# Altium PCB icaplamp_evo.PcbDoc
Units mil, origin at the board's own origin, x right, y up, seen from the top; angles counter-clockwise.
Board outline 2362.2 x 1574.8 mil, 2 copper layers (Top Layer, Bottom Layer); 26 components, 48 nets, 156 pads, 25 vias.
Unrouted connection lines stored in the file: 2.
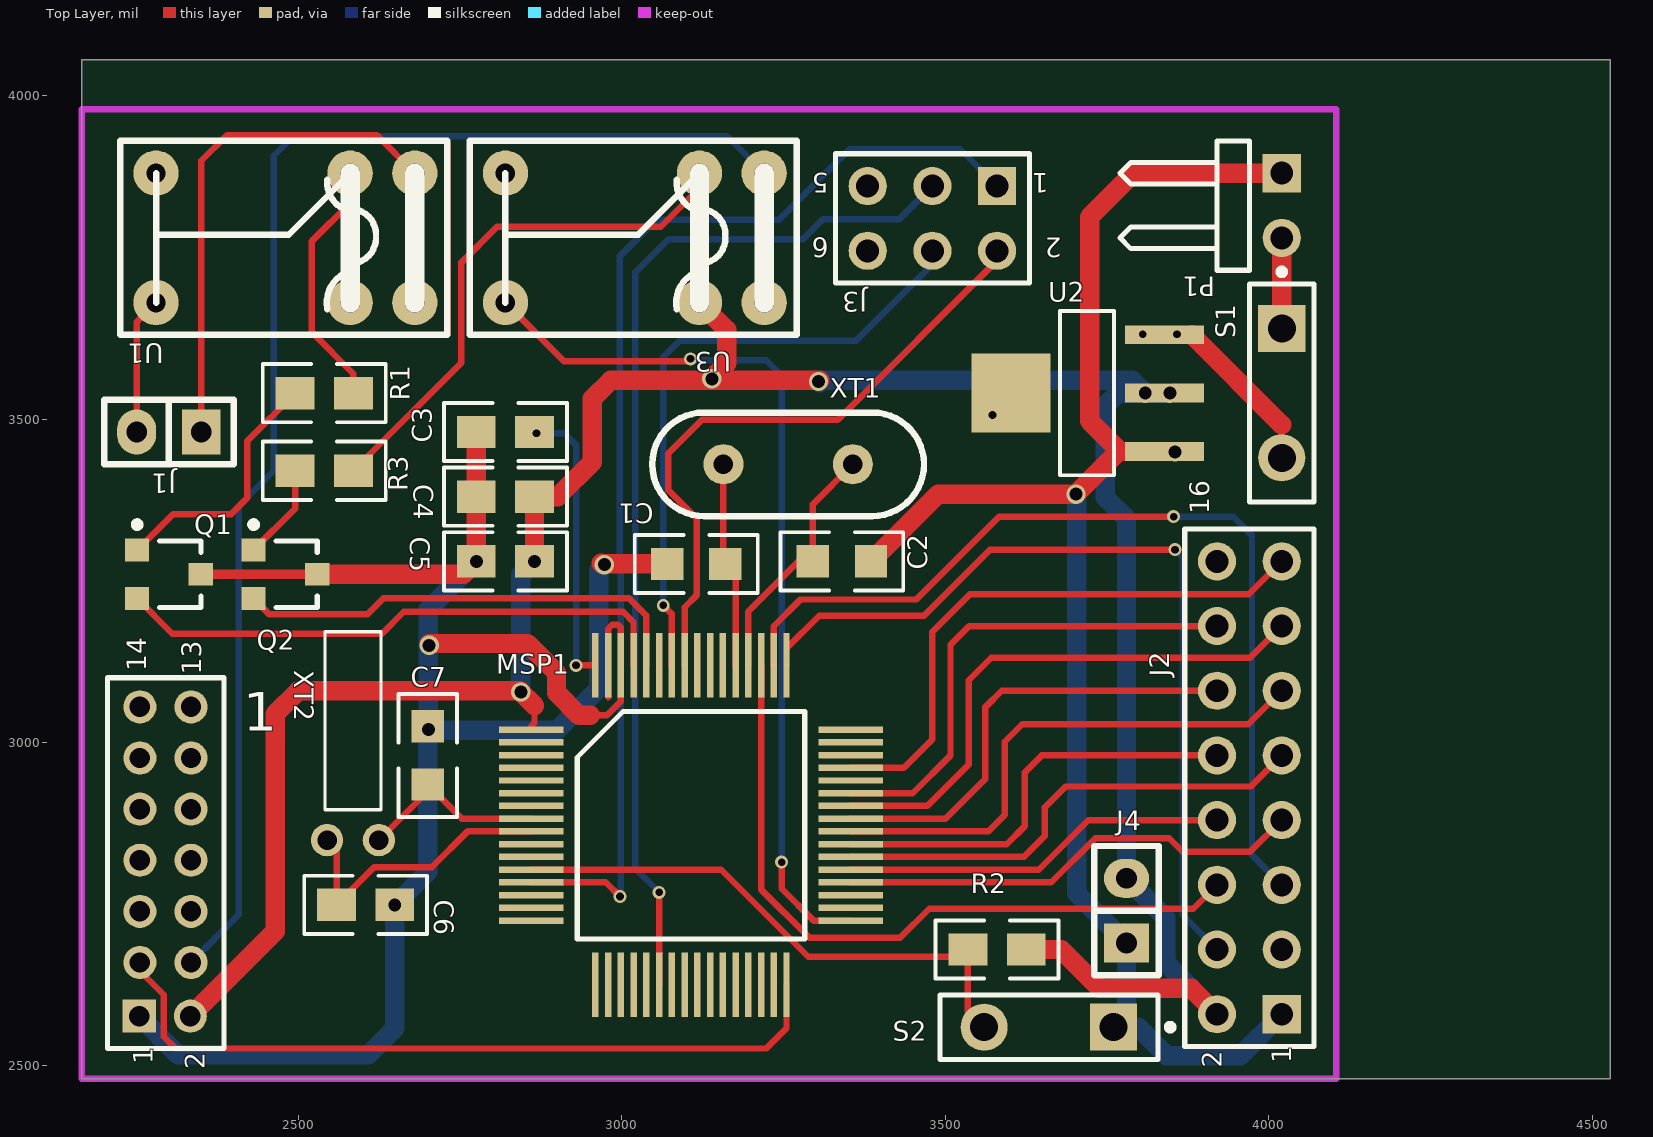
[diagram p0: Top Layer view]
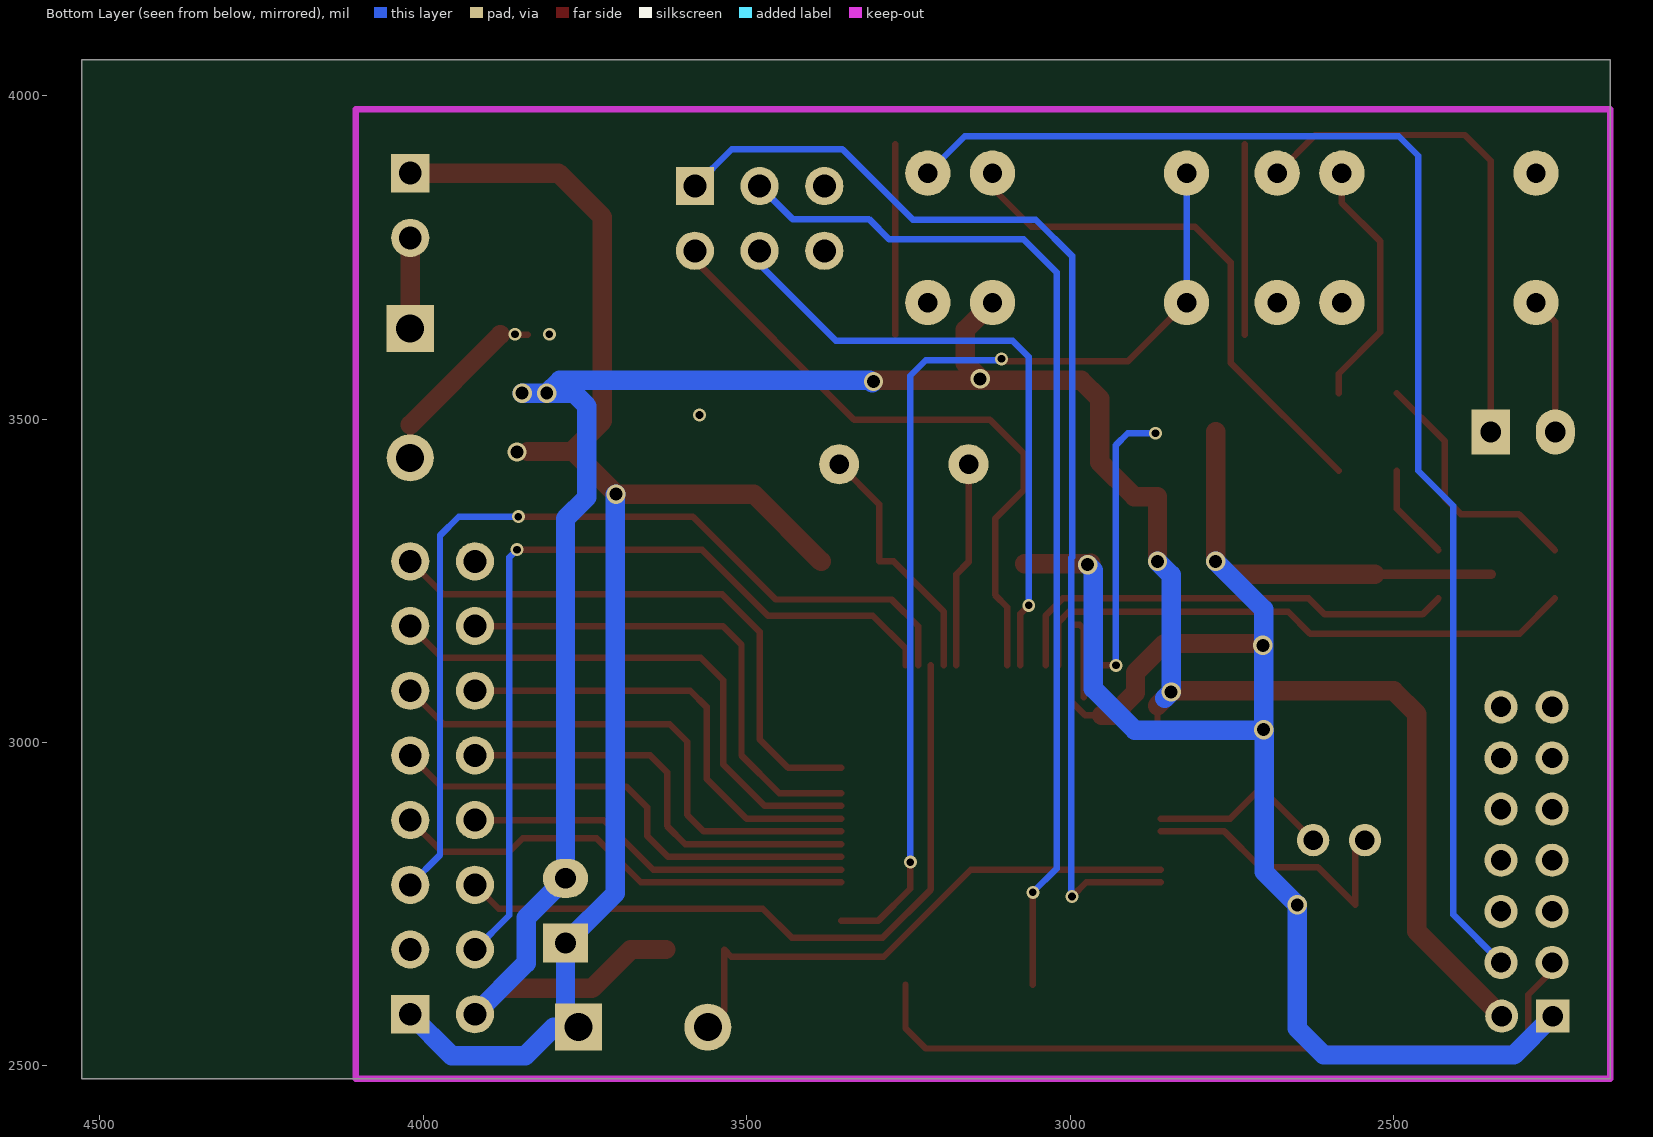
[diagram p1: Bottom Layer view, seen from below]

## Layer stack, top to bottom
Top Layer: signal copper 1.4
Dielectric: dielectric 12.6, FR-4, Dk 4.8
Bottom Layer: signal copper 1.4

## Board outline
2165.35,4055.12 2165.35,2480.32 4527.56,2480.32 4527.56,4055.12

## Design rules (kind name [scope] priority, off if disabled: settings)
Clearance [All] p1: gap=5
ComponentClearance [All] p1: gap=10 collisioncheckmode=3 verticalgap=10
PlaneClearance [All] p1: clearance=5
PolygonConnect [All] p1: connectstyle=Relief reliefconductorwidth=10 reliefentries=4 polygonreliefangle="90 Angle"
RoutingVias [All] p1: holewidth=15 width=25 viastyle="Through Hole" minholewidth=10 minwidth=15 maxholewidth=100 maxwidth=100
SolderMaskExpansion [All] p1: expansion=5
TestPointUsage [All] p1: valid=0 allowmultiple=FALSE
Testpoint [All] p1: side=15 testpointundercomponent=TRUE minsize=40 maxsize=100 preferedsize=60 minholesize=0 maxholesize=40 preferedholesize=32 testpointgrid=1 style=1023 order=0123456789
Width [All] p1: maxlimit=100 minlimit=1 preferedwidth=15
16 further rules are at their usual default settings.

## Components (designator, comment, footprint, x,y, rotation, side; value= is the part's Value field where it differs from the comment)
1 "WIFI_CON" wificon 1960,2640 r0 top
C1 "22pF" 0805#1 3115,3276 r0 top
C2 "22pF" 0805#1 3340,3280 r180 top
C3 "104" 0805#2 2820,3480 r180 top
C4 "104" 0805#2 2820,3380 r0 top
C5 "104" 0805#2 2820,3280 r0 top
C6 "Cap" 0805#2 2604,2749 r0 top
C7 "Cap" 0805#1 2700,2980 r90 top
J1 "LIGHT_CONTROL_CON" SIP2 2300,3480 r180 top
J2 "LCD_CON" HDR2X8 4020,2580 r90 top
J3 "BSL" HDR2X3 3580,3860 r180 top
J4 "LCD_VCC_CON" SIP2 3780,2740 r90 top
MSP1 "MSP430F149IPAG" PAG 2860,3020 r0 top
P1 "Power_In" HDR1X2H 4020,3880 r270 top
Q1 "QNPN" SO-G3/C2.5 2300,3260 r270 top
Q2 "QNPN" SO-G3/C2.5 2480,3260 r270 top
R1 "Res2" 0805#2 2540,3540 r0 top
R2 "Res2" 0805#2 3580,2680 r180 top
R3 "Res2" 0805#2 2540,3420 r0 top
S1 "SW-PB" SPST-2 4020,3540 r270 top
S2 "SW-PB" SPST-2 3660,2560 r180 top
U1 "RELAY3.3V" Relay5V 2420,3660 r90 top
U2 "AMS1117" SOT-223 3720,3540 r90 top
U3 "RELAY3.3V" Relay5V 2960,3660 r90 top
XT1 "8MHZ" HC-49S 3517,3310 r180 top
XT2 "32768HZ" AT26 2484,2789 r90 top

## Footprints (in the part's own frame and the unit in brackets; to place one, negate y for a bottom-side part, rotate by r counter-clockwise, add the part's x,y. Pads: shape width x height; smd on the part's side, far side on the other; paste and mask are expansions set on the pad)
0805#1 [mil]
  rect 50x50 smd: 1(-45,0) 2(45,0)
  silkscreen extent -95,-45 95,45
0805#2 [mil]
  rect 60x50 smd: 1(-45,0) 2(45,0)
  silkscreen extent -95,-45 95,45
AT26 [mil]
  round 50 hole 30: 1(60,-140.35) 2(60,-60.35)
  silkscreen extent 105,-144 382,-57
HC-49S [mil]
  round 62 hole 30: 1(160,-120) 2(360,-120)
  silkscreen extent 50,-200 470,-40
HDR1X2H [mm] "Connector; Header; 2 Position; Right Angle"
  rect 1.5x1.5 hole 0.9: 1(0,0)
  round 1.5 hole 0.9: 2(2.54,0)
  silkscreen extent -1.27,-6.35 3.81,-1.27
HDR2X3 [mm] "Connector; Header; 3x2 Position"
  rect 1.5x1.5 hole 0.9: 1(0,0)
  round 1.5 hole 0.9: 2(0,2.54) 3(2.54,0) 4(2.54,2.54) 5(5.08,0) 6(5.08,2.54)
  silkscreen extent -1.27,-1.27 6.35,3.81
HDR2X8 [mm] "Connector; Header; 8x2 Position"
  rect 1.5x1.5 hole 0.9: 1(0,0)
  round 1.5 hole 0.9: 2(0,2.54) 3(2.54,0) 4(2.54,2.54) 5(5.08,0) 6(5.08,2.54) 7(7.62,0) 8(7.62,2.54) 9(10.16,0) 10(10.16,2.54) 11(12.7,0) 12(12.7,2.54) 13(15.24,0) 14(15.24,2.54) 15(17.78,0) 16(17.78,2.54)
  silkscreen extent -1.27,-1.27 19.05,3.81
PAG [mil]
  rect 100x10 smd: 1(0,0) 2(0,-19.68) 3(0,-39.37) 4(0,-59.05) 5(0,-78.74) 6(0,-98.43) 7(0,-118.11) 8(0,-137.8) 9(0,-157.48) 10(0,-177.16) 11(0,-196.85) 12(0,-216.53) 13(0,-236.22) 14(0,-255.91) 15(0,-275.59) 16(0,-295.28) 33(493.7,-295.28) 34(493.7,-275.59) 35(493.7,-255.91) 36(493.7,-236.22) 37(493.7,-216.53) 38(493.7,-196.85) 39(493.7,-177.16) 40(493.7,-157.48) 41(493.7,-137.8) 42(493.7,-118.11) 43(493.7,-98.43) 44(493.7,-78.74) 45(493.7,-59.05) 46(493.7,-39.37) 47(493.7,-19.68) 48(493.7,0)
  rect 10x100 smd: 17(99.21,-394.49) 18(118.9,-394.49) 19(138.58,-394.49) 20(158.27,-394.49) 21(177.95,-394.49) 22(197.64,-394.49) 23(217.32,-394.49) 24(237.01,-394.49) 25(256.69,-394.49) 26(276.38,-394.49) 27(296.06,-394.49) 28(315.75,-394.49) 29(335.43,-394.49) 30(355.12,-394.49) 31(374.8,-394.49) 32(394.49,-394.49) 49(394.49,99.21) 50(374.8,99.21) 51(355.12,99.21) 52(335.43,99.21) 53(315.75,99.21) 54(296.06,99.21) 55(276.38,99.21) 56(256.69,99.21) 57(237.01,99.21) 58(217.32,99.21) 59(197.64,99.21) 60(177.95,99.21) 61(158.27,99.21) 62(138.58,99.21) 63(118.9,99.21) 64(99.21,99.21)
  silkscreen extent 71,-323 423,28
Relay5V [mil]
  round 70 hole 30: 1(20,140) 1(220,140) 2(20,-260) 3(220,-260) 4(20,-160) 5(220,-160)
  Top Layer lines w10: -30,-310 265,-310
  silkscreen extent -30,-310 270,195
SIP2 [mil]
  rect 60x70 hole 32: 1(-50,0)
  oval 60x70 hole 32: 2(50,0)
  silkscreen extent -100,-50 100,50
SO-G3/C2.5 [mm] "SOT-23; 3 Leads; Body 3.0 x 2.6 mm, inc. leads (LxW max)"
  rect 0.9x0.95 smd: 1(-0.95,-1.25) 2(0.95,-1.25) 3(0,1.25)
  silkscreen extent -2.07,-1.37 1.3,1.25
SOT-223 [mm]
  rect 3.1x3.1 smd: 0(0,3.01)
  rect 0.74x3.1 smd: 1(-2.29,-3.01) 2(0,-3.01) 3(2.29,-3.01)
  silkscreen extent -3.23,-1.03 3.23,1.08
SPST-2 [mm] "Circuit Breaker; 2 Leads"
  rect 1.85x1.85 hole 1.1: 1(-2.54,0)
  round 1.85 hole 1.1: 2(2.54,0)
  silkscreen extent -4.89,-1.27 4.28,1.27
wificon [mm]
  rect 1.3x1.3 hole 0.8: 1(7.468,-1.6)
  round 1.3 hole 0.8: 2(9.474,-1.6) 3(7.493,0.508) 4(9.5,0.508) 5(7.493,2.515) 6(9.5,2.515) 7(7.493,4.521) 8(9.5,4.521) 9(7.493,6.528) 10(9.5,6.528) 11(7.493,8.534) 12(9.5,8.534) 13(7.493,10.541) 14(9.5,10.541)
  silkscreen extent 6.22,-2.87 10.79,11.68

## Part data
1: library part CON14
C1 C2 C3 C4 C5: library part Cap, "Capacitor"
C6 C7: "Capacitor"
J1 J4: library part CON2
J2: library part CON16
J3: library part CON6
P1: library part "Header 2H", "Header, 2-Pin, Right Angle"
Q1 Q2: "NPN Bipolar Transistor"
R1 R2 R3: "Resistor"
S1 S2: "Switch"
U1 U3: library part RELAY5V
U2: "LDO ADJ"
XT1: "CY-49S-8MHZ"
XT2: "CY-AT26-32768HZ"

## Via types
v1: diameter 30, hole 20, Top Layer to Bottom Layer, 13 vias
v2: diameter 20, hole 12, Top Layer to Bottom Layer, 12 vias

## Nets (pads, with @x,y where several pads share a name; then routed paths per layer and width w, separated by ;. In a path a pad name is that pad's centre, name@x,y a point inside that pad or via, vN(x,y) a via of type N, cw(c..) or ccw(c..) an arc to the next point about the centre after c; other vN are vias at no path point)
BSL_RXD: J3.3 MSP1.22 | length 1630.8
  Top Layer w10: MSP1.22 v2(3057.64,2768.36)
  Bottom Layer w10: v2(3057.64,2768.36) 3021,2805 3021,3727 3072,3778 3280,3778 3311,3809 3429,3809 J3.3
BSL_TXD: J3.1 MSP1.13 | length 1811.8
  Top Layer w10: MSP1.13 2975.22,2783.78 v2(2997,2762)
  Bottom Layer w10: v2(2997,2762) 2998,2763 2998,3285.36 2997,3286.36 2997,3752 3053,3808 3243,3808 3352,3917 3523,3917 J3.1
DGND: J3.5
EC: J2.6 MSP1.51 | length 1116.2
  Top Layer w10: MSP1.51 3215.12,2772.88 3290,2698 3430,2698 3475,2743 3883,2743 J2.6
GND: 1.1 C1.1 C2.1 C3.2 C4.1 C5.1 C6.2 C7.2 J2.1 J4.1 MSP1.62 MSP1.63 P1.1 Q1.3 Q2.3 S2.1 U2.1 | length 5541.6
  Top Layer w10: 2934,3042 2977,3042 2998.58,3063.58 MSP1.62 2998.58,3177.42 2994,3182 2985,3182 2978.9,3175.9 MSP1.63 ; MSP1.63@2978.9,3069.75 MSP1.63 ; MSP1.63@2978.9,3136.1 MSP1.63
  Top Layer w15: Q1.3 Q2.3
  Top Layer w30: Q2.3 2755,3260 v1(2775,3280) C4.1 ; v1@2702,3153 2854,3153 2899,3108 2899,3077 2934,3042 2951.14,3042 ; 2775,3440 C4.1 ; C3.2 C4.1 ; v1@2968,3277 2969,3276 C1.1 ; C2.1 3489,3384 v1(3702,3384) 3767.84,3449.84 3770.16,3449.84 ; U2.1 3770.16,3449.84 ; P1.1 3791,3880 3723,3812 3723,3497 3770.16,3449.84
  Bottom Layer w30: 1.1 2314,2517 2608,2517 2649,2558 v1(2649,2749) 2700,2800 v1@2700,3019 ; v1(2775,3280) 2701,3206 v1(2701,3020) v1@2700,3019 ; v1(2973,3275) 2964,3266 2964,3083 2900,3019 v1@2700,3019 ; v1(3702,3384) 3703,3383 3703,2767 J4.1 3780,2580 S2.1 3798,2560 3842,2516 3956,2516 J2.1
  other v1: 2702,3150 3855,3449
NetC1_2: C1.2 MSP1.53 XT1.2 | length 318.6
  Top Layer w10: XT1.2 3157,3279 3175.75,3260.25 MSP1.53
NetC2_2: C2.2 MSP1.52 XT1.1 | length 390.6
  Top Layer w10: MSP1.52 3195.43,3202.43 3273,3280 C2.2 3295,3368 XT1.1
NetC3_1: C3.1 MSP1.64 | length 439.6
  Top Layer w10: v2@2929,3119 v2(2929.21,3119.21) MSP1.64
  Bottom Layer w10: v2(2868,3478) 2911,3478 2929.21,3459.79 v2(2929.21,3119.21)
NetC6_1: C6.1 MSP1.9 XT2.2 | length 454.1
  Top Layer w10: XT2.2 2559,2834.35 C6.1 2617,2807 2706,2807 2761.52,2862.52 MSP1.9
NetC7_1: C7.1 MSP1.8 XT2.1 | length 299.2
  Top Layer w10: XT2.1 2700,2924.64 C7.1 2752.79,2882.2 MSP1.8
NetJ1_1: J1.1 U1.3 | length 790
  Top Layer w10: J1.1 2350,3899 2390,3939 2621,3939 U1.3
NetJ1_2: J1.2 U1.1 | length 212.4
  Top Layer w10: J1.2 2250,3650 U1.1@2280,3680
NetJ2_7: J2.7 MSP1.36 | length 723.6
  Top Layer w10: MSP1.36 3663.78,2783.78 3732,2852 3846,2852 3867,2831 3971,2831 J2.7
NetJ2_8: J2.8 MSP1.37 | length 598
  Top Layer w10: MSP1.37 3644.47,2803.47 3721,2880 J2.8
NetJ2_9: J2.9 MSP1.38 | length 757
  Top Layer w10: MSP1.38 3621.15,2823.15 3654,2856 3654,2900 3686,2932 3972,2932 J2.9
NetJ2_10: J2.10 MSP1.39 | length 671.7
  Top Layer w10: MSP1.39 3594.84,2842.84 3623,2871 3623,2954 3649,2980 J2.10
NetJ2_11: J2.11 MSP1.40 | length 822.6
  Top Layer w10: MSP1.40 3566.52,2862.52 3592,2888 3592,3001 3619,3028 3968,3028 J2.11
NetJ2_12: J2.12 MSP1.41 | length 713.3
  Top Layer w10: MSP1.41 3500.2,2882.2 3562,2944 3562,3055 3587,3080 J2.12
NetJ2_13: J2.13 MSP1.42 | length 857.6
  Top Layer w10: MSP1.42 3471.89,2901.89 3536,2966 3536,3096 3571,3131 3971,3131 J2.13
NetJ2_14: J2.14 MSP1.43 | length 773.5
  Top Layer w10: MSP1.43 3449.57,2921.57 3508,2980 3508,3151 3537,3180 J2.14
NetJ2_15: J2.15 MSP1.45 | length 895.7
  Top Layer w10: MSP1.45 3435.95,2960.95 3480,3005 3480,3171 3538,3229 3969,3229 J2.15
NetMSP1_12: MSP1.12 R2.2 S2.2 | length 865.6
  Top Layer w10: MSP1.12 3153.53,2803.47 3288,2669 3524,2669 R2.2 3535,2585 S2.2
NetMSP1_33: MSP1.33 U3.1 | length 1596.6
  Top Layer w10: U3.1@2820,3680 2911,3589 v2@3107,3589 ; v2(3247,2815) 3247,2774 3296.28,2724.72 MSP1.33
  Bottom Layer w10: U3.1@2820,3680 U3.1@2820,3880 ; v2(3106,3593) 3108,3591 3223,3591 3247,3567 v2(3247,2815)
NetQ1_1: Q1.1 R1.1 | length 396.2
  Top Layer w10: Q1.1 2306.39,3353 2396,3353 2421,3378 2421,3466 R1.1
NetQ2_1: Q2.1 R3.1 | length 149.2
  Top Layer w10: Q2.1 2495,3361.61 R3.1
NetR1_2: R1.2 U1.5 | length 390.9
  Top Layer w10: U1.5 2580,3834 2521,3775 2521,3634 2585,3570 R1.2
NetR3_2: R3.2 U3.5 | length 829.8
  Top Layer w10: R3.2 2752,3587 2752,3742 2807,3797 3060,3797 3115.13,3852.13 3115.13,3875.13 U3.5
NetS1_2: S1.2 U2.3 | length 290.1
  Top Layer w10: U2.3 U2.3@3880.84,3630.16 ; S1.2 4020,3491
  Top Layer w30: U2.3@3880.84,3630.16 4020,3491
  other v2: 3805,3631 3858,3631
NLINK: 1.8
NLOAD: 1.10
NREADY: 1.9
PHY_RX+: 1.11
PHY_RX-: 1.12
PHY_TX+: 1.13
PHY_TX-: 1.14
RELAY_CONTROL: MSP1.60 Q2.2 | length 715.4
  Top Layer w10: Q2.2 2455.39,3198 2606.4,3198 2631,3222.6 3011.4,3222.6 3037.95,3196.05 MSP1.60
RELAY_CONTROL_SWITCH: MSP1.61 Q1.2 | length 877.3
  Top Layer w10: Q1.2 2305.18,3168.21 2629.21,3168.21 2663,3202 3002,3202 3018,3186 3018,3119.48 MSP1.61
RESET: 1.7
RS: J2.4 MSP1.49 | length 1334.9
  Top Layer w10: MSP1.49 3254.49,3145.49 3305,3196 3467,3196 3569,3298 v2(3855,3298)
  Bottom Layer w10: v2(3855,3298) 3867,3286 3867,2733 J2.4
RST: J3.4 MSP1.58 | length 978.5
  Top Layer w10: v2(3064,3212) 3077.32,3198.68 MSP1.58
  Bottom Layer w10: v2(3064,3212) 3064,3596 3089,3621 3362,3621 3480,3739 J3.4
RW: J2.5 MSP1.50 | length 1440.9
  Top Layer w10: MSP1.50 3234.8,3179.8 3276,3221 3455,3221 3583,3349 v2(3853,3349)
  Bottom Layer w10: v2(3853,3349) 3945,3349 3974,3320 3974,2826 J2.5
TCK: J3.2 MSP1.57 | length 1000.3
  Top Layer w10: MSP1.57 3097.01,3209.01 3116,3228 3116,3346 3072,3390 3072,3447 3124,3499 3334,3499 3580,3745 J3.2
UART_CTS: 1.6
UART_RTS: 1.5
UART_RXD: 1.4 U3.3 | length 2094.1
  Bottom Layer w10: 1.4 2408,2734 2408,3366 2462,3420 2462,3907 2492,3937 3163,3937 U3.3
UART_TXD: 1.3 MSP1.32 | length 1180.3
  Top Layer w10: 1.3 2255,2647.18 2292,2610.18 2292,2545 2310,2527 3223,2527 3254.49,2558.49 MSP1.32
VCC: 1.2 C4.2 C5.2 J2.2 J4.2 MSP1.1 R2.1 U2.2 U3.4 | length 3993.6
  Top Layer w10: 2860,3025.32 2865,3030.32 2865,3057
  Top Layer w30: 1.2 2464,2708 2464,3044 2500,3080 2842,3080 2865,3057 ; v1(2865,3280) C4.2 2901,3380 2954,3433 2954,3531 2983,3560 v1@3306,3560 ; U3.4 3162,3638 3162,3586 v1@3137,3561 ; R2.1 3679,2680 3739,2620 3880,2620 J2.2
  Bottom Layer w30: v1@2853.5,3068.5 v1(2844,3078) 2844,3259 v1(2865,3280) ; v1@3306,3556 3310,3560 3789,3560 v1(3809,3540) ; v1(3847,3540) v1(3809,3540) ; J2.2 3841,2659 3841,2729 J4.2 3780,3346 3747,3379 3747,3520 3767,3540 v1(3809,3540)
  other v1: 3304,3558 3139,3562
VCC-3.7V: P1.2 S1.1 | length 140
  Top Layer w30: S1.1 P1.2
pads on no net: J2.3 J2.16 J3.6 MSP1.2 MSP1.3 MSP1.4 MSP1.5 MSP1.6 MSP1.7 MSP1.10 MSP1.11 MSP1.14 MSP1.15 MSP1.16 MSP1.17 MSP1.18 MSP1.19 MSP1.20 MSP1.21 MSP1.23 MSP1.24 MSP1.25 MSP1.26 MSP1.27 MSP1.28 MSP1.29 MSP1.30 MSP1.31 MSP1.34 MSP1.35 MSP1.44 MSP1.46 MSP1.47 MSP1.48 MSP1.54 MSP1.55 MSP1.56 MSP1.59 U1.2 U1.4 U2.0 U3.2
copper on no net:
  other v2: 3573,3506

## Keep-outs
Keep-Out Layer:
  lines w10: 2165.35,2480.32 2165.35,3979 4104,3979 4104,2480.32 2165.35,2480.32

## Text inside footprints (layer, text, board x,y; h text height)
1: Top Overlay "14" at 2265,3110 h30 r90; Top Overlay "13" at 2350,3105 h30 r90; Top Overlay "2" at 2355,2495 h30 r90
J2: Top Overlay "2" at 3927,2497 h30 r90; Top Overlay "1" at 4035,2504 h30 r90; Top Overlay "16" at 3908,3353 h30 r90
J3: Top Overlay "6" at 3320,3780 h30 r180; Top Overlay "5" at 3320,3880 h30 r180; Top Overlay "2" at 3680,3780 h30 r180; Top Overlay "1" at 3660,3880 h30 r180